# EAGLE board iofresh (EAGLE 9.6.2)
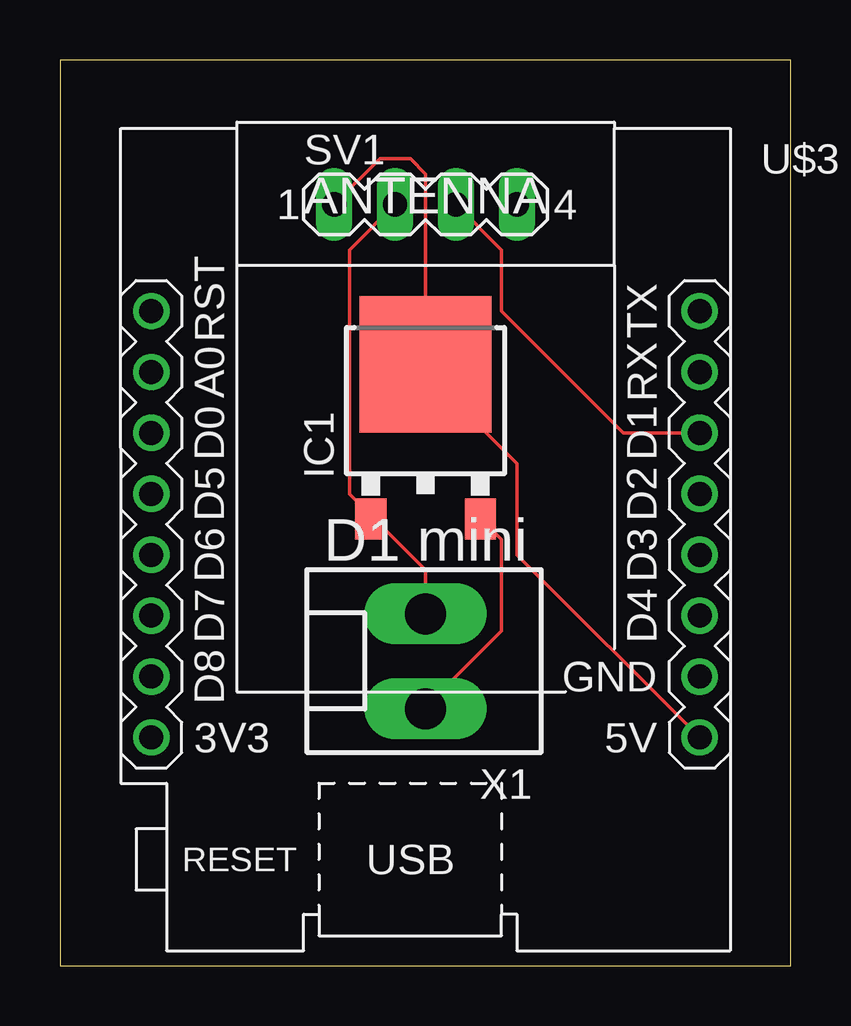
[diagram p0: board, top side]
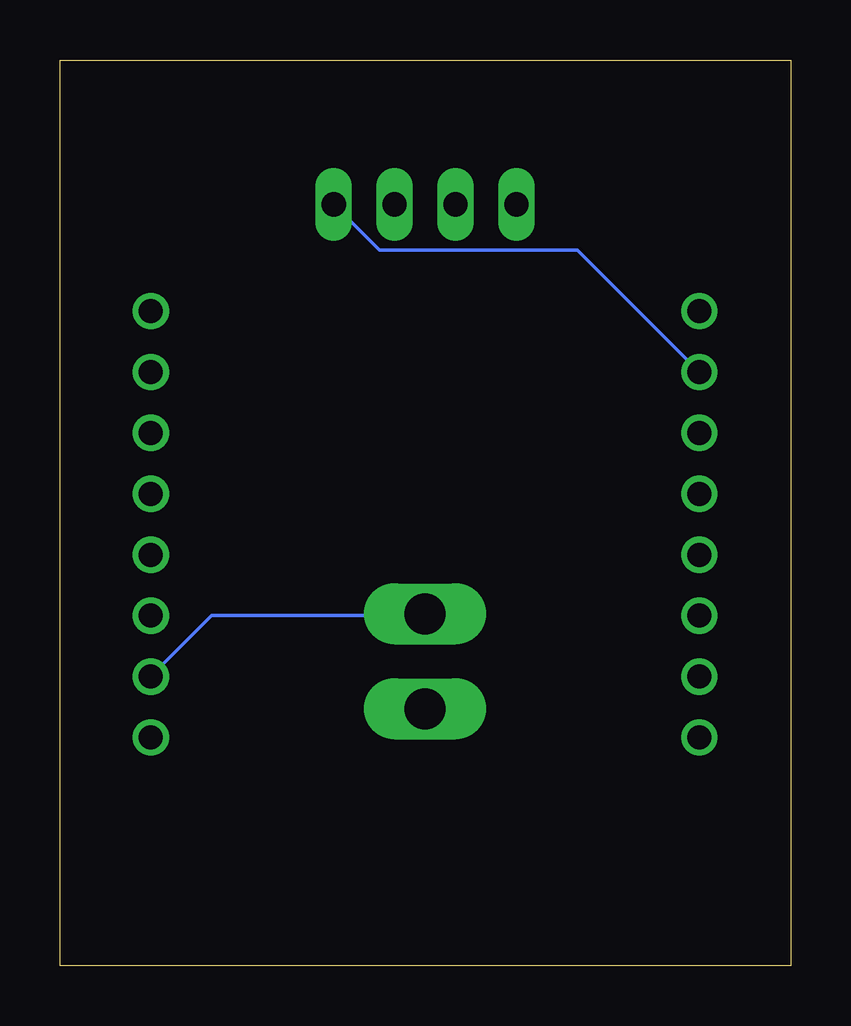
[diagram p1: board, bottom side, seen from below]

Size 30.46 x 37.77 mm. Coordinates in mm from the lower left corner, seen from the top.
Outline: 0,0 30.46,0 30.46,37.77 0,37.77 0,0
Copper layers (1*16): Top 0.035mm / dielectric 1.5mm / Bottom 0.035mm
Design rules "default": minimum track width 6mil, minimum drill 0.35mm, track to track 6mil, track to pad 6mil, pad to pad 6mil, via to via 6mil, smd to smd 6mil, copper to edge 40mil, drill to drill 6mil, minimum pad ring 10mil, minimum via ring 8mil, stop-mask expansion 4mil, vias tented up to drill 0mil, thermal gap 10mil

## Footprints (pad centres in the part's own frame; a part is rotated, then mirrored left to right if it is on the bottom)
TO252 = smd 1.3 x 1.7: 1 -2.285,-4.22; 2 2.285,-4.22 | smd 5.5 x 5.7: 3 0,2.22
MA04-1 = drill 1.016 long: 1 -3.81,0; 2 -1.27,0; 3 1.27,0; 4 3.81,0
WEMOS-D1-MINI = drill 1: JP1.1 -11.43,9.525; JP1.2 -11.43,6.985; JP1.3 -11.43,4.445; JP1.4 -11.43,1.905; JP1.5 -11.43,-0.635; JP1.6 -11.43,-3.175; JP1.7 -11.43,-5.715; JP1.8 -11.43,-8.255; JP2.1 11.43,9.525; JP2.2 11.43,6.985; JP2.3 11.43,4.445; JP2.4 11.43,1.905; JP2.5 11.43,-0.635; JP2.6 11.43,-3.175; JP2.7 11.43,-5.715; JP2.8 11.43,-8.255
KK-156-2 = drill 1.7 pad 2.184 long: 1 -1.98,0; 2 1.98,0

## Placement (x,y rotation side)
IC1  LM1117DT-5.0  [TO252]  15.24,22.86 0 top
SV1  [MA04-1]  15.24,31.75 0 top
U$3  WEMOS-D1-MINI  [WEMOS-D1-MINI]  15.24,17.78 0 top
X1  [KK-156-2]  15.24,12.7 90 top

## Library data of the parts
IC1 = lm1117_10; MF: Texas Instruments; MPN: LM1117DT-5.0; OC_FARNELL: 9486283; OC_NEWARK: 41K3431
SV1 = con-lstb; OC_FARNELL: unknown; OC_NEWARK: unknown
U$3 = diy-modules
X1 = con-molex; MF: MOLEX; OC_FARNELL: unknown; OC_NEWARK: unknown

## Nets
3V3: U$3.JP1.8
N$1: IC1.2 X1.1
N$2: IC1.3 SV1.1 U$3.JP2.8
N$3: IC1.1 SV1.2 U$3.JP2.7 X1.2
N$4: SV1.3 U$3.JP2.3
N$5: SV1.4 U$3.JP1.2

## Tracks (layer width: path | path; a pad name or v marks a point on that pad's centre or on a via)
N$1
  Top 0.152: IC1.2 17.78,18.41 18.41,17.78 18.41,13.97 15.24,10.79 X1.1
N$2
  Top 0.152: U$3.JP2.8 19.05,17.14 19.05,20.95 15.24,24.77 IC1.3 15.24,33.02 14.61,33.66 13.34,33.66 SV1.1
N$3
  Top 0.152: X1.2 15.24,16.51 13.34,18.41 IC1.1 12.7,19.05 12.06,19.68 12.06,29.84 SV1.2
  Bottom 0.152: U$3.JP2.7 24.13,14.61 15.24,14.61 X1.2
N$4
  Top 0.152: U$3.JP2.3 23.5,22.23 18.41,27.3 18.41,29.84 SV1.3
N$5
  Bottom 0.152: U$3.JP1.2 8.89,29.84 17.14,29.84 SV1.4